# Altium PCB 垃圾分类组1.PcbDoc
Units mil, origin at the board's own origin, x right, y up, seen from the top; angles counter-clockwise.
Board outline 3937.01 x 3937 mil, 4 copper layers (Top Layer, 5V, VCC, Bottom Layer), stack 30.634 mil thick; 67 components, 53 nets, 337 pads, 119 vias.
Unrouted connection lines stored in the file: 1.
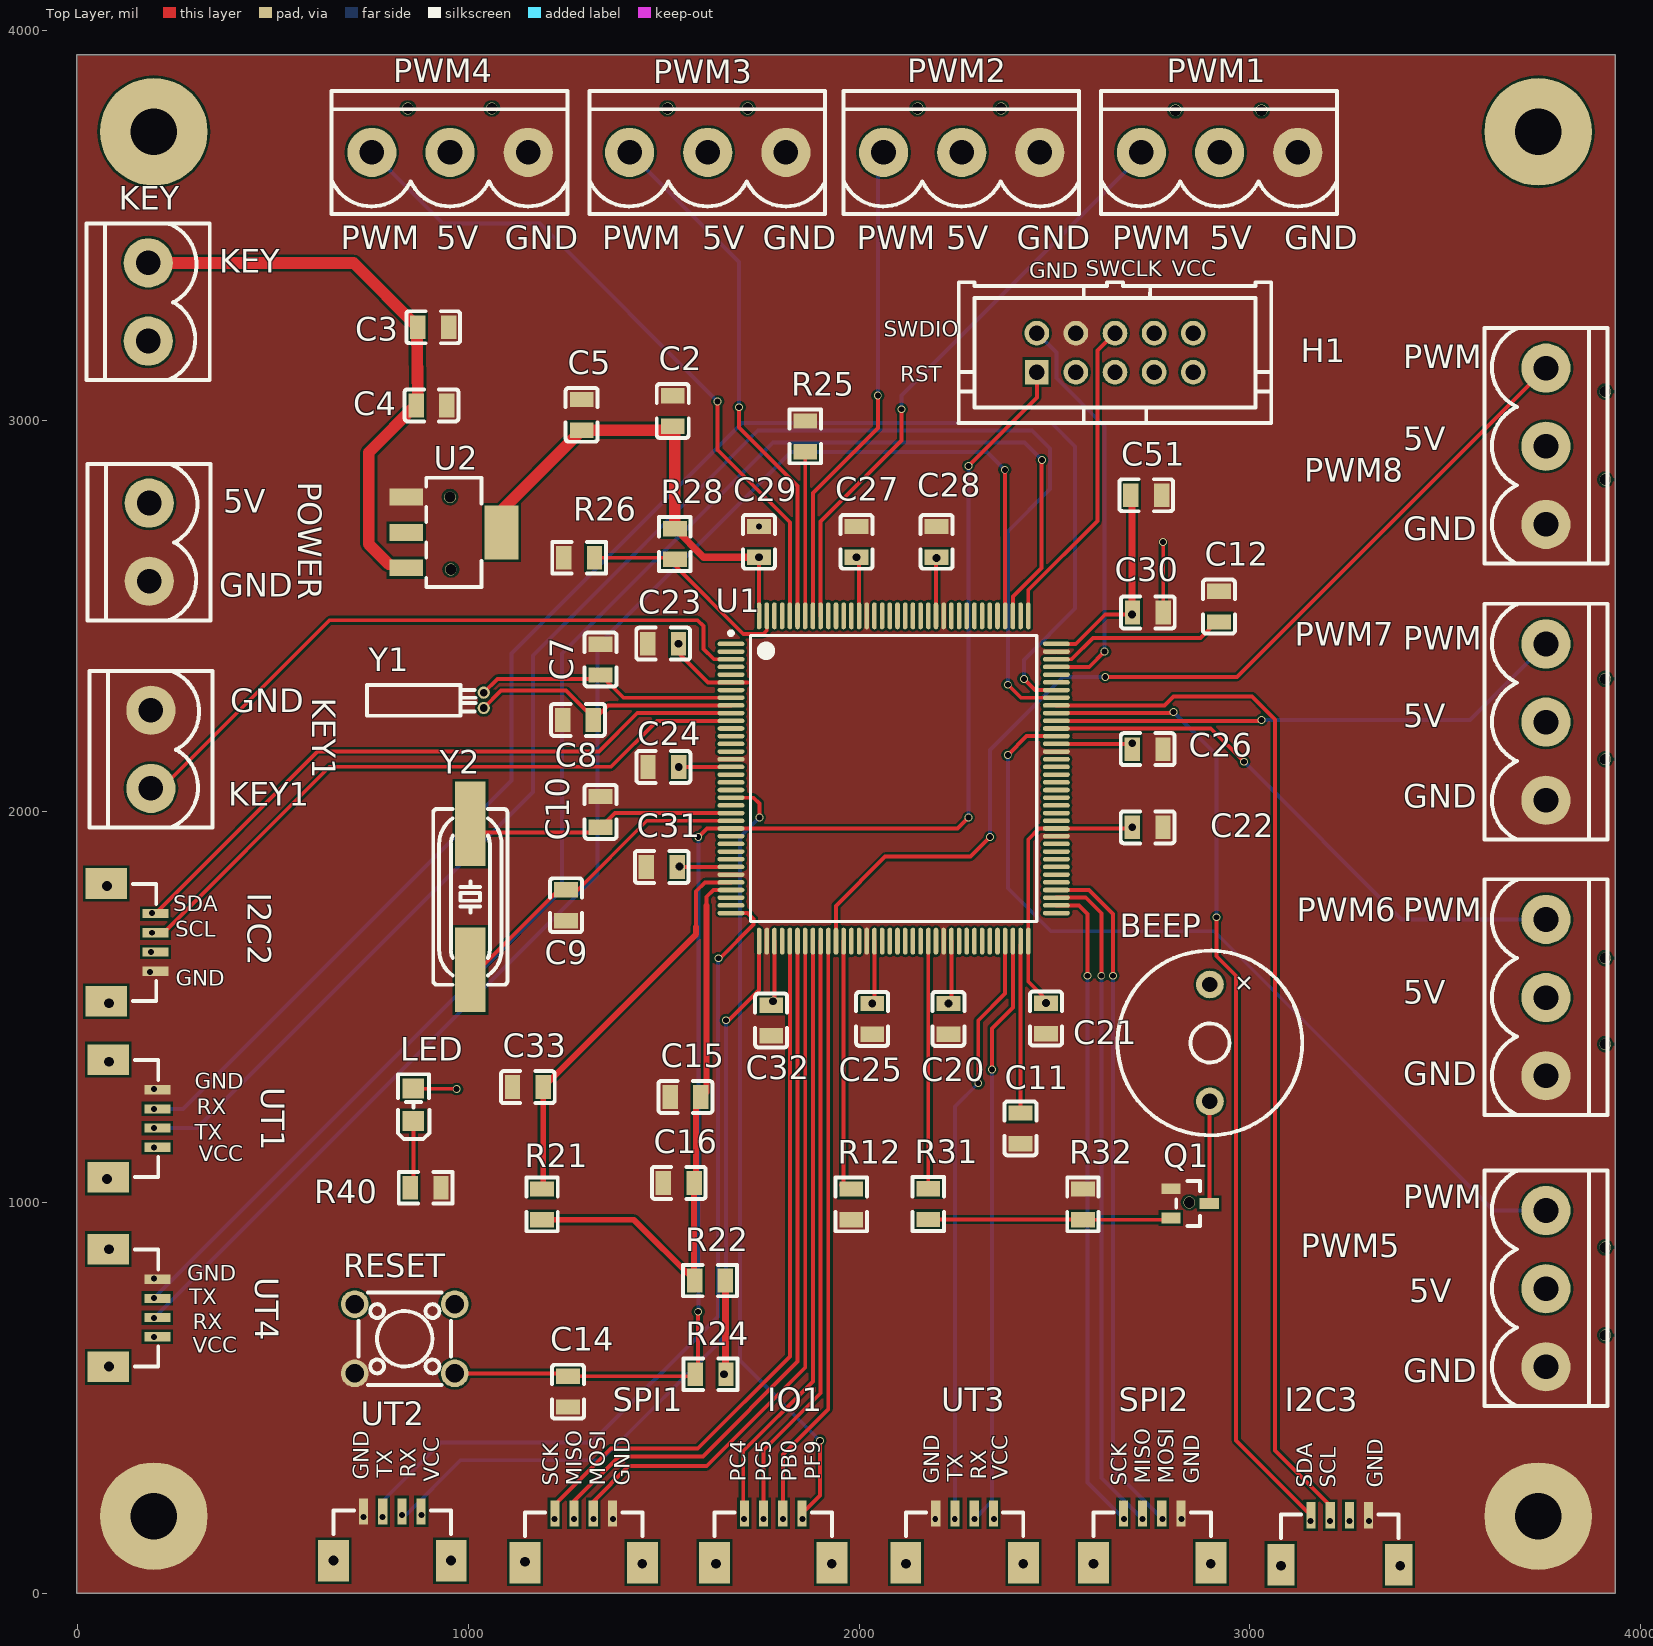
[diagram p0: Top Layer view]
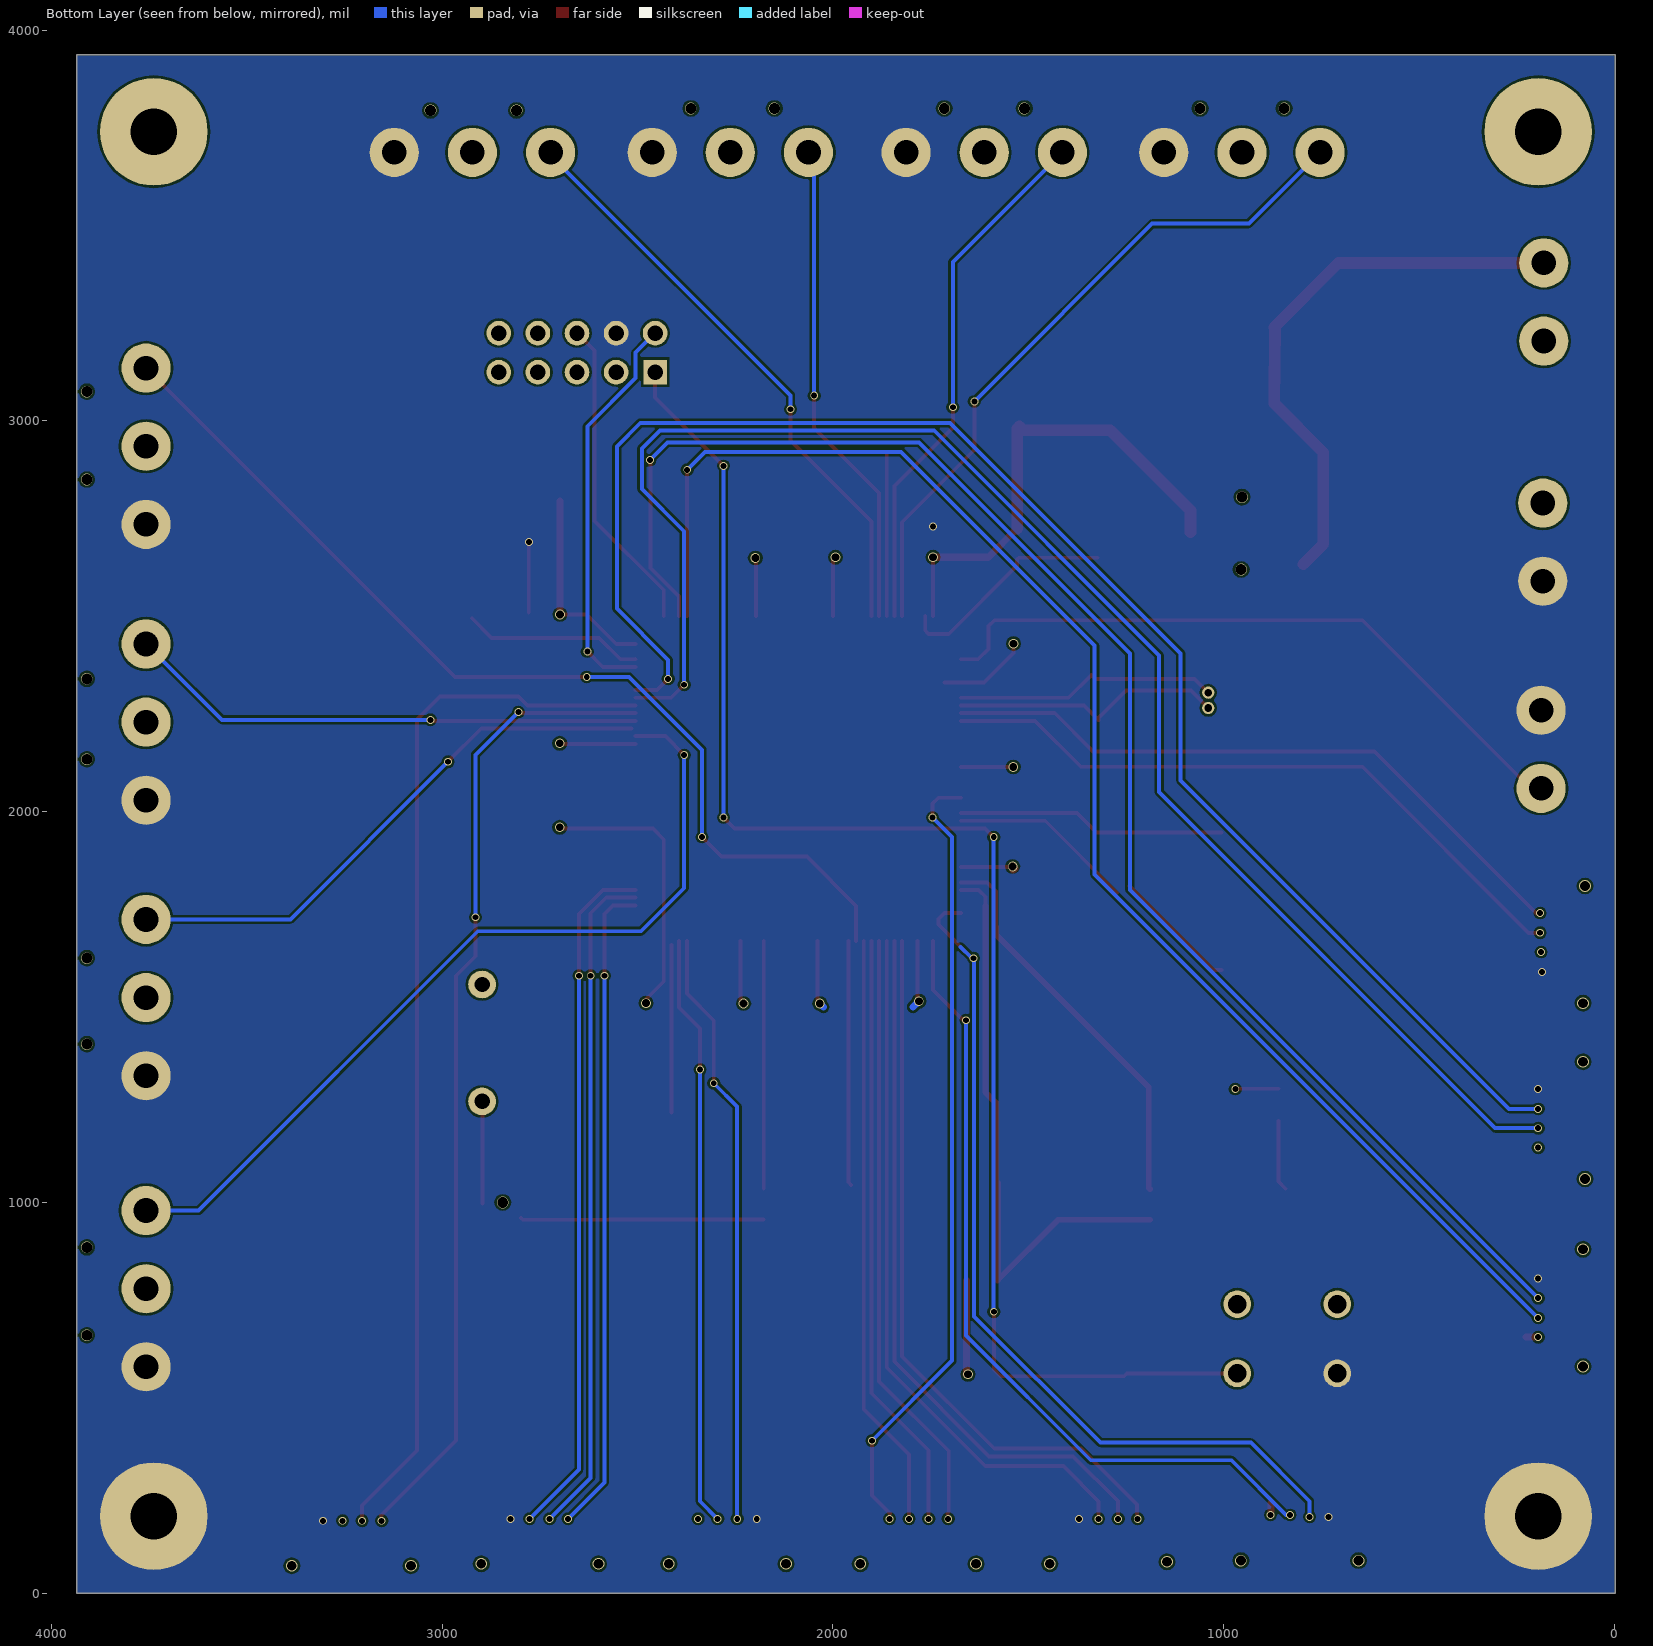
[diagram p1: Bottom Layer view, seen from below]
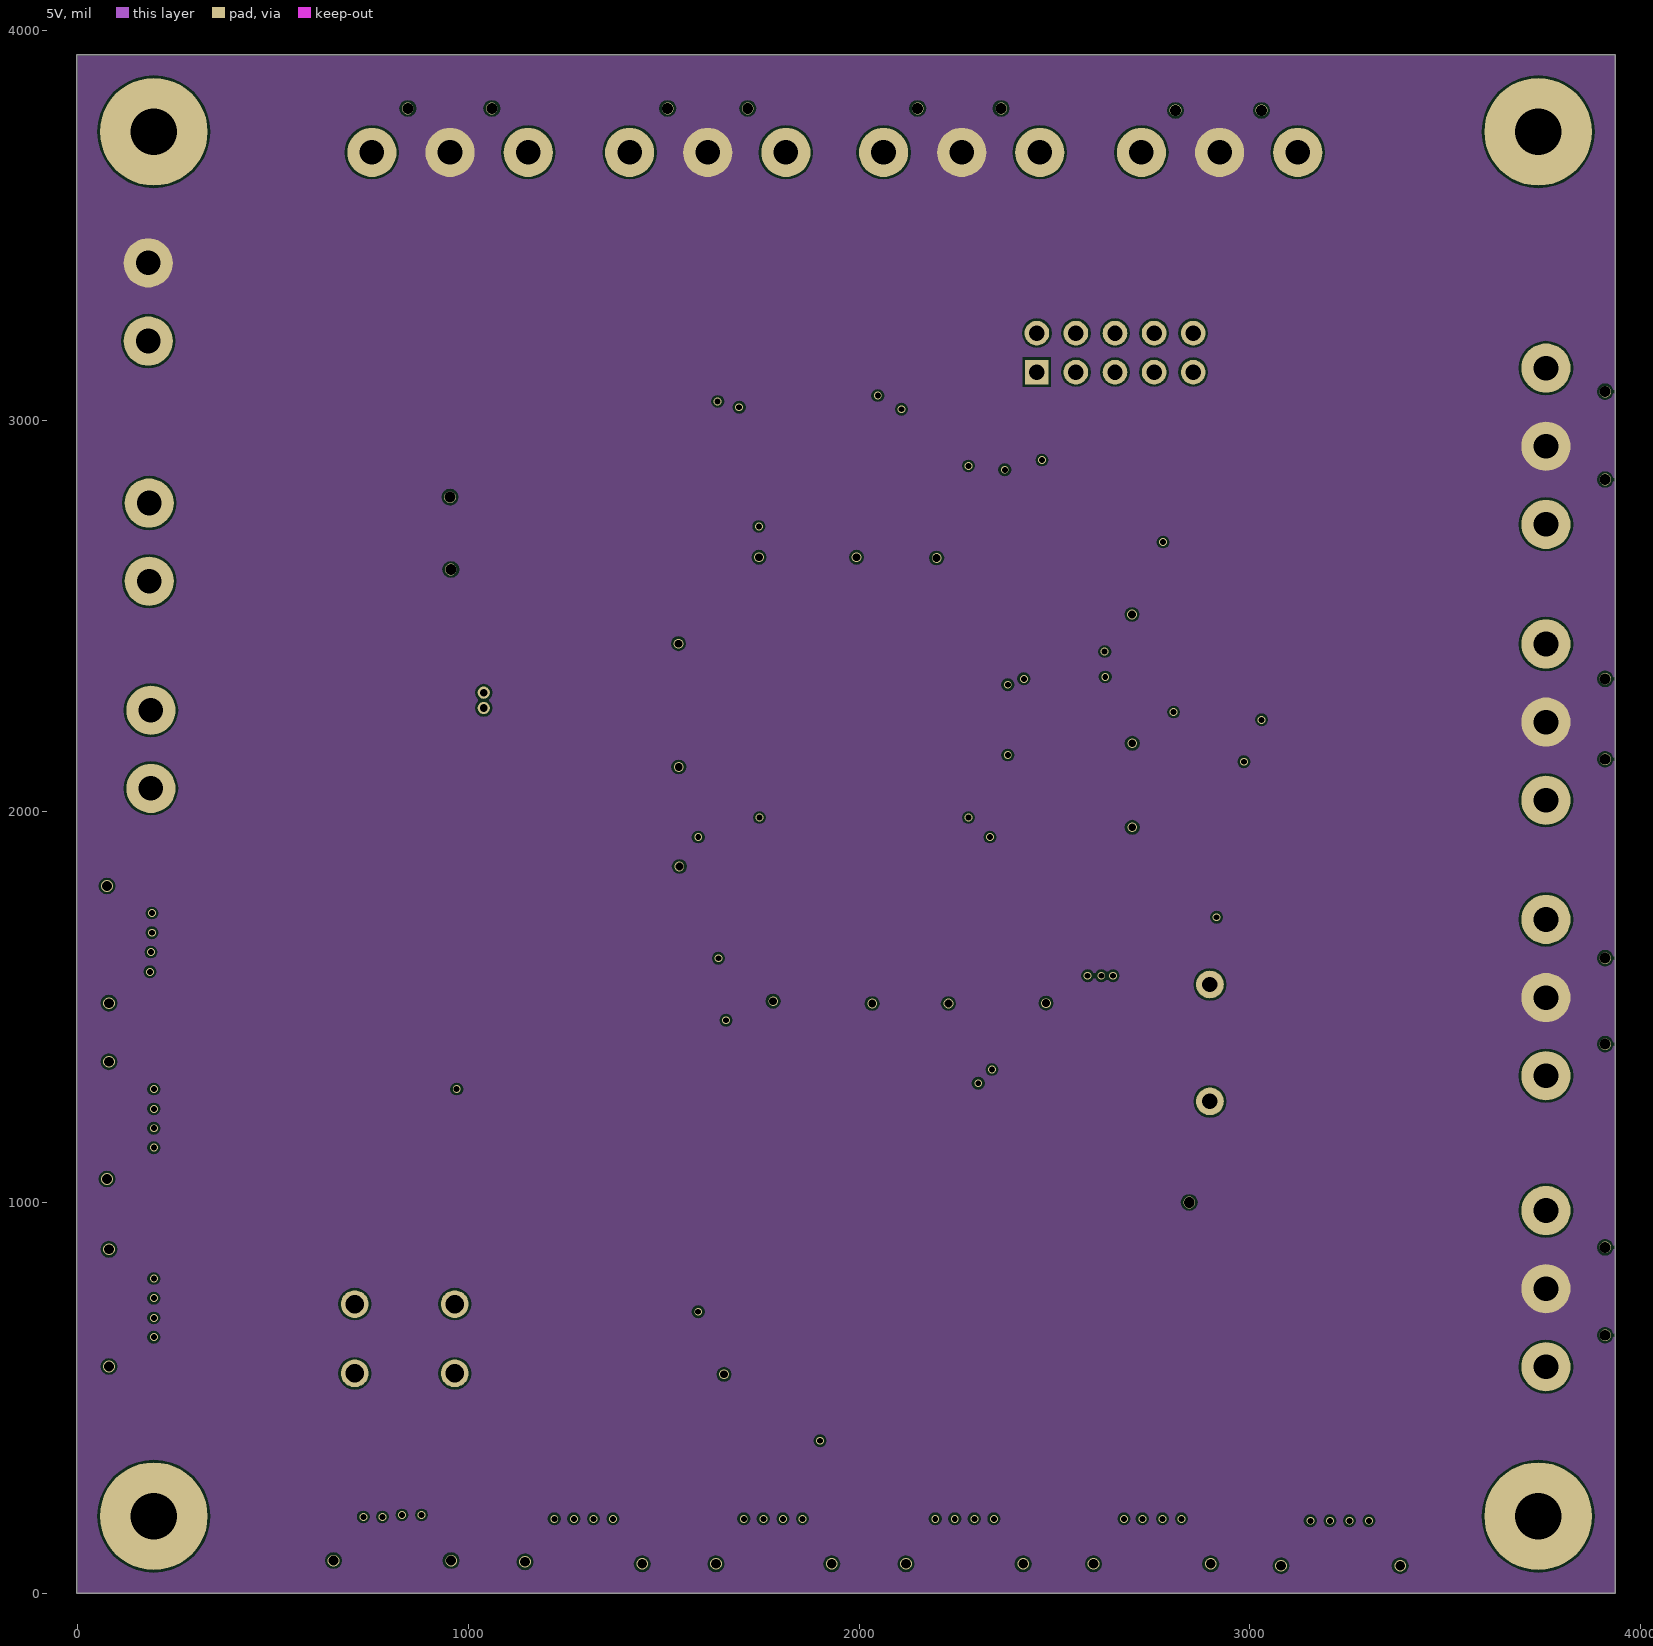
[diagram p2: 5V]
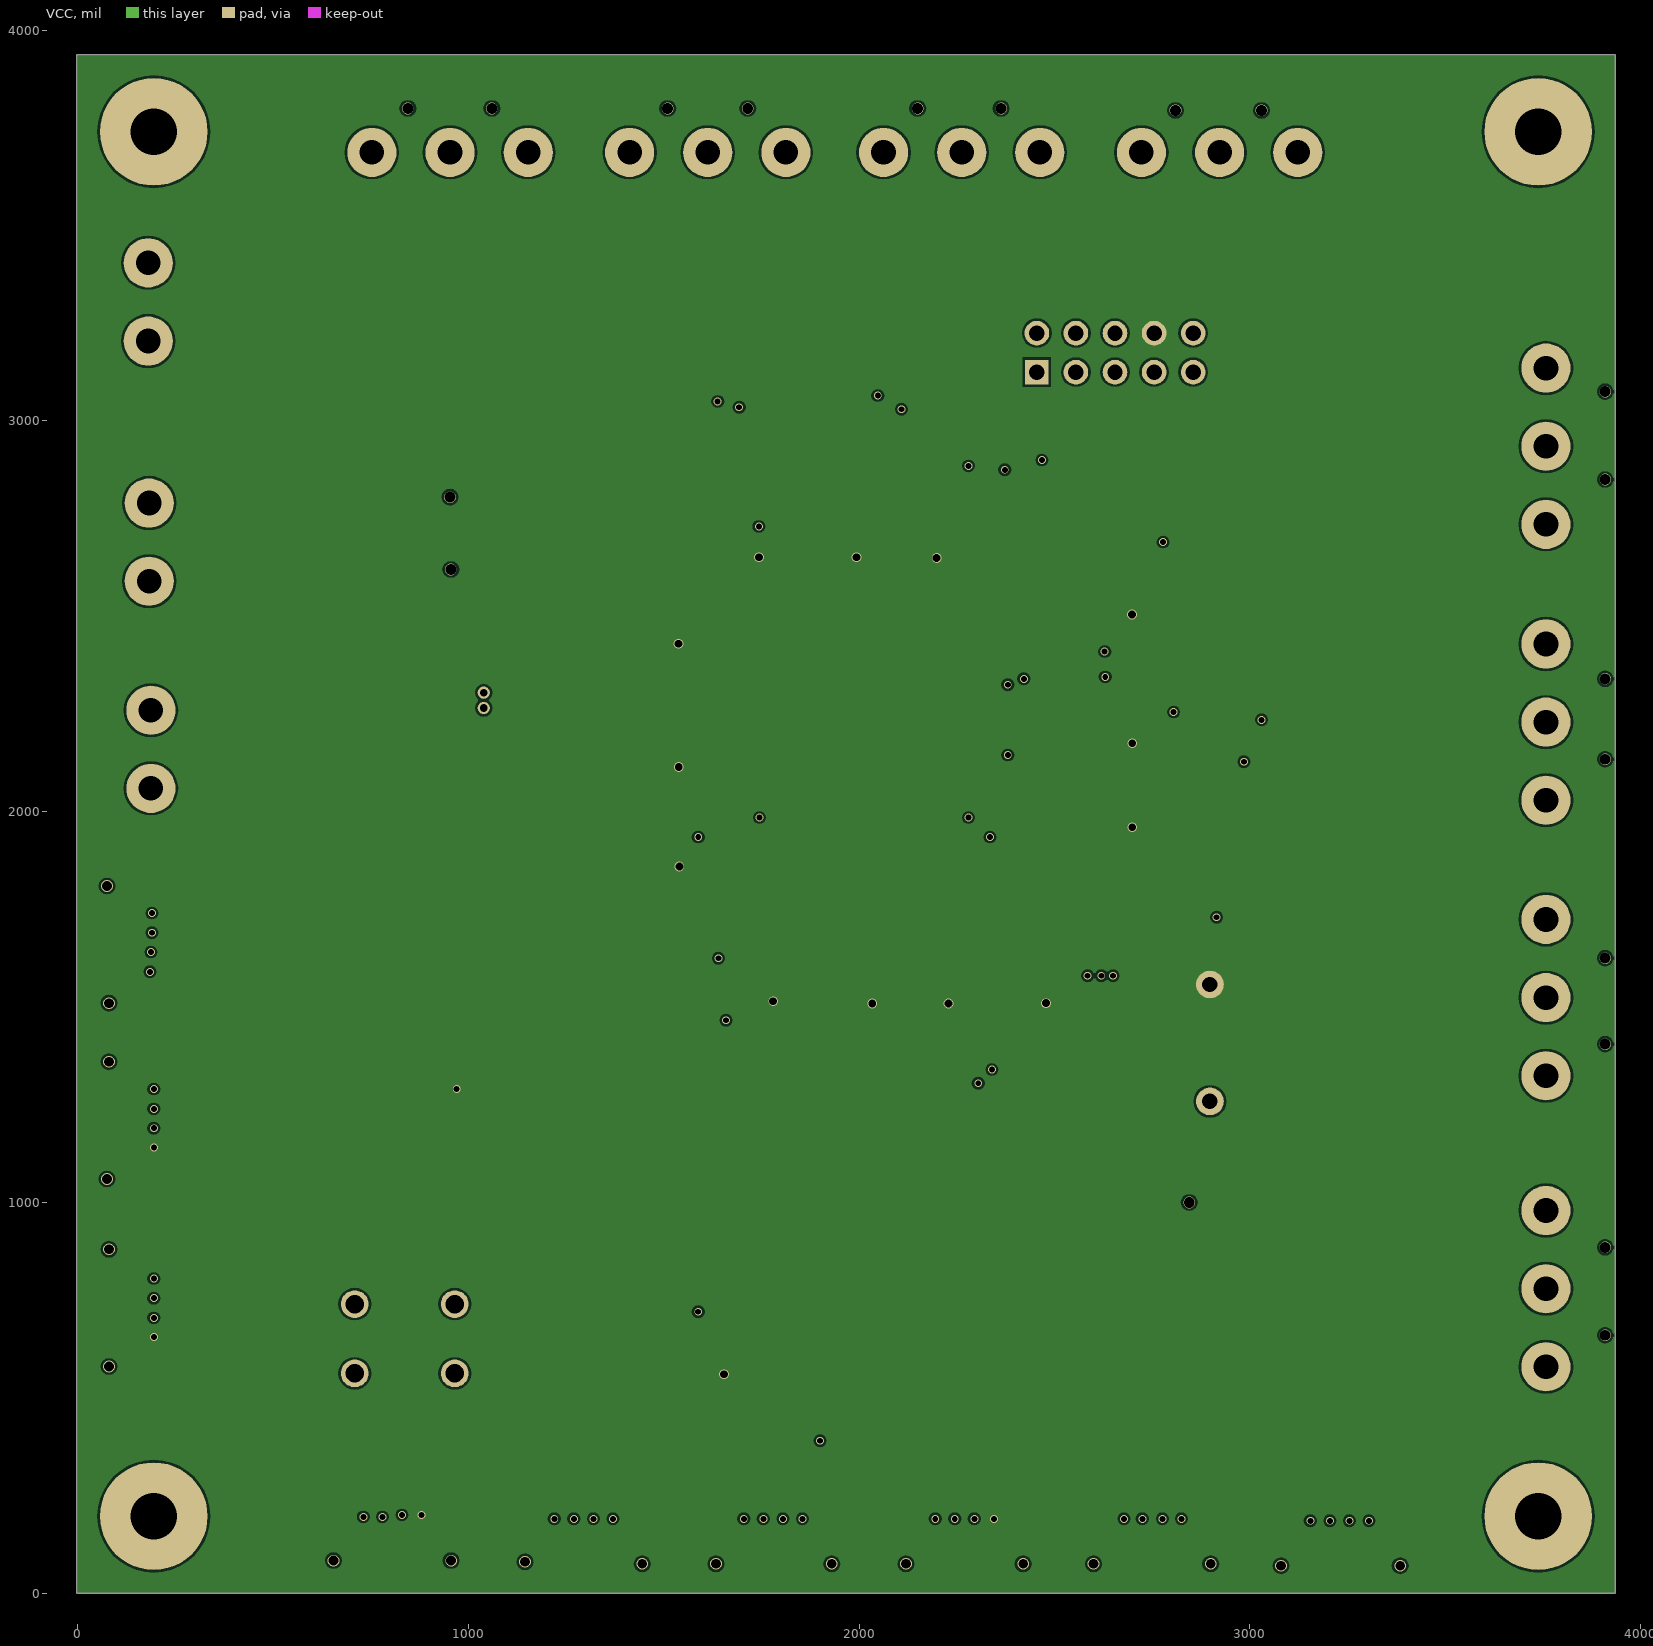
[diagram p3: VCC]

## Layer stack, top to bottom
Top Solder: solder mask 0.4, Solder Resist, Dk 3.5
Top Layer: signal copper 1.4
Dielectric 1: core 10, FR-4, Dk 4.2
5V: signal copper 1.417
Dielectric 3: prepreg 5, Dk 4.2
VCC: signal copper 1.417
Dielectric 2: core 10, Dk 4.2
Bottom Layer: signal copper 1.4
Bottom Solder: solder mask 0.4, Solder Resist, Dk 3.5

## Board outline
-2.01,0 -2.01,3937 3935,3937 3934.99,0

## Design rules (kind name [scope] priority, off if disabled: settings)
Clearance [All] p1: gap=6 ignorepadtopadclearanceinfootprint=FALSE
PolygonConnect PolygonConnect_G [IsVia] p1: connectstyle=Direct reliefconductorwidth=10 reliefentries=4 polygonreliefangle="90 Angle" airgapwidth=10
PolygonConnect PolygonConnect_H [All] p2: connectstyle=Direct reliefconductorwidth=15 reliefentries=4 polygonreliefangle="90 Angle" airgapwidth=15
RoutingVias [All] p1: holewidth=28 width=50 viastyle="Through Hole" minholewidth=28 minwidth=50 maxholewidth=28 maxwidth=50
SolderMaskExpansion [All] p1: expansion=4 istentingtop=FALSE
Width Width_1 [All] p1: maxlimit=100 minlimit=10 preferedwidth=10 midlayer1_maxwidth=10 midlayer2_maxwidth=10 minimp=50.000000 maximp=50.000000 favimp=50.000000
30 further rules are at their usual default settings.

## Components (designator, comment, footprint, x,y, rotation, side; value= is the part's Value field where it differs from the comment)
BEEP "" 蜂鸣器 2901.7,1400 r270 top
C2 "104" C0805 1522.99,3025.63 r90 top
C3 "106" C0805 910,3240 r0 top
C4 "104" C0805 905.63,3040 r0 top
C5 "106" C0805 1290,3015.63 r90 top
C7 "12pF" C0805 1338.5,2389.37 r270 top
C8 "12pF" C0805 1280.63,2235 r0 top
C9 "22pF" C0805 1250,1760.63 r270 top
C10 "22pF" C0805 1338.5,1999.37 r90 top
C11 "225" C0805 2413.11,1189.37 r270 top
C12 "225" C0805 2921,2525 r90 top
C14 "104" C0805 1255,515.63 r90 top
C15 "104" C0805 1555.63,1270 r0 top
C16 "106" C0805 1538.5,1050 r0 top
C20 "104" C0805 2228.5,1469.61 r270 top
C21 "104" C0805 2478.5,1470.63 r270 top
C22 "104" C0805 2738.5,1960 r0 top
C23 "104" C0805 1498.5,2430 r180 top
C24 "104" C0805 1499.13,2114.53 r180 top
C25 "104" C0805 2033.5,1469.61 r270 top
C26 "104" C0805 2738.5,2160 r0 top
C27 "104" C0805 1993.5,2690.63 r90 top
C28 "104" C0805 2198.5,2690.63 r90 top
C29 "104" C0805 1743.5,2690.63 r90 top
C30 "104" C0805 2739.13,2510 r0 top
C31 "104" C0805 1495,1858.62 r180 top
C32 "104" C0805 1775,1465.63 r270 top
C33 "104" C0805 1152.24,1295 r180 top
C51 "104" C0805 2735,2810 r0 top
H1 "" 牛角座2.54-2x5P 2684.9,3200 r0 top
I2C2 "" GH1.25_4P#1 135,1660.66 r270 top
I2C3 "" GH1.25_4P#2 3235,135 r0 top
IO1 "" GH1.25_4P#1 1785,140 r0 top
KEY "" Porwer 162.99,3305 r270 top (schematic designator H3)
KEY1 "" Porwer 170,2160 r270 top
LED "" LED0805BLUE 860,1245 r90 top
POWER "" Porwer 165.51,2690.39 r270 top
PWM1 "" PWM 2917.99,3700 r180 top
PWM2 "" PWM 2257.99,3700 r180 top
PWM3 "" PWM 1607.99,3700 r180 top
PWM4 "" PWM 948.38,3700 r180 top
PWM5 "" PWM 3770.47,783.82 r90 top
PWM6 "" PWM 3770.47,1528.82 r90 top
PWM7 "" PWM 3770.47,2233.82 r90 top
PWM8 "" PWM 3770.47,2940 r90 top
Q1 "S8050" S8050 2842.99,1000 r180 top
R12 "10K" R0805 1980,995 r270 top
R21 "0R" R0805 1188.5,995 r270 top
R22 "0R" R0805 1618.5,800 r0 top
R24 "10K" R0805 1620,560 r0 top
R25 "10K" R0805 1862.13,2960.63 r90 top
R26 "0R" R0805 1283.5,2650 r180 top
R28 "0R" R0805 1528.5,2685 r90 top
R31 "1K" R0805 2177.09,995.63 r270 top
R32 "1K" R0805 2572.99,995 r270 top
R40 "680R" R0805 890.63,1037.48 r180 top
RESET "Key" "KEY - duplicate" 840,665 r180 top
SPI1 "" GH1.25_4P#1 1300,140 r0 top
SPI2 "" GH1.25_4P#1 2755,140 r0 top
U1 "STM32F407ZET6" LQFP144N 2088.5,2085 r0 top
U2 "AMS1117-3.3V" ASM1117（yyh） 958.31,2709.76 r180 top
UT1 "" GH1.25_4P#1 140,1210 r270 top
UT2 "" GH1.25_4P#1 810,145 r0 top
UT3 "" GH1.25_4P#1 2275,140 r0 top
UT4 "" GH1.25_4P#1 140,725 r270 top
Y1 "32.768k" 晶振（32.768MHz） 895,2285 r0 top value=8MHz
Y2 "8MHz" 晶振（8MHz） 1005,1782.01 r270 top

## Footprints (in the part's own frame and the unit in brackets; to place one, negate y for a bottom-side part, rotate by r counter-clockwise, add the part's x,y. Pads: shape width x height; smd on the part's side, far side on the other; paste and mask are expansions set on the pad)
ASM1117（yyh） [mm]
  rect 2.2x1.1 smd: 1(2.98,-2.433) 2(2.98,-0.133) 3(2.98,2.167)
  rect 2.2x3.5 smd: 4(-3.218,-0.133)
  silkscreen extent -1.92,-3.68 1.68,3.42
C0805 [mm]
  rect 1x1.55 smd: 1(-1,0) 2(1,0)
  silkscreen extent -1.75,-1.04 1.75,1.04
GH1.25_4P#1 [mil]
  rect 23.6x67 smd: 1(-78.54,64.14) 2(-29.34,64.14) 3(19.87,64.14) 4(69.08,64.14)
  rect 78.74x106.3 smd: 5(145.85,-61.85) 6(-155.32,-61.85)
  silkscreen extent -155,6 145,66
GH1.25_4P#2 [mil]
  rect 23.6x67 smd: 1(-78.54,64.14) 2(-29.34,64.14) 3(19.87,64.14) 4(69.08,64.14)
  rect 70x106.3 smd: 5(145.85,-61.85) 6(-155.32,-61.85)
  silkscreen extent -155,6 145,66
"KEY - duplicate" [mm]
  round 1.8 hole 1.2: 1(-3.178,2.606) 2(3.322,2.606) 3(-3.178,-1.894) 4(3.322,-1.894)
  silkscreen extent -2.93,-2.64 3.07,3.36
LED0805BLUE [mil]
  rect 51.2x55.1 smd: 1(45.9,0.55) 2(-36.8,0.55)
  silkscreen extent -83,-41 83,41
LQFP144N [mm]
  oval 1.75x0.297 smd: 1(-10.575,8.75) 2(-10.575,8.25) 3(-10.575,7.75) 4(-10.575,7.25) 5(-10.575,6.75) 6(-10.575,6.25) 7(-10.575,5.75) 8(-10.575,5.25) 9(-10.575,4.75) 10(-10.575,4.25) 11(-10.575,3.75) 12(-10.575,3.25) 13(-10.575,2.75) 14(-10.575,2.25) 15(-10.575,1.75) 16(-10.575,1.25) 17(-10.575,0.75) 18(-10.575,0.25) 19(-10.575,-0.25) 20(-10.575,-0.75) 21(-10.575,-1.25) 22(-10.575,-1.75) 23(-10.575,-2.25) 24(-10.575,-2.75) 25(-10.575,-3.25) 26(-10.575,-3.75) 27(-10.575,-4.25) 28(-10.575,-4.75) 29(-10.575,-5.25) 30(-10.575,-5.75) 31(-10.575,-6.25) 32(-10.575,-6.75) 33(-10.575,-7.25) 34(-10.575,-7.75) 35(-10.575,-8.25) 36(-10.575,-8.75) 73(10.575,-8.75) 74(10.575,-8.25) 75(10.575,-7.75) 76(10.575,-7.25) 77(10.575,-6.75) 78(10.575,-6.25) 79(10.575,-5.75) 80(10.575,-5.25) 81(10.575,-4.75) 82(10.575,-4.25) 83(10.575,-3.75) 84(10.575,-3.25) 85(10.575,-2.75) 86(10.575,-2.25) 87(10.575,-1.75) 88(10.575,-1.25) 89(10.575,-0.75) 90(10.575,-0.25) 91(10.575,0.25) 92(10.575,0.75) 93(10.575,1.25) 94(10.575,1.75) 95(10.575,2.25) 96(10.575,2.75) 97(10.575,3.25) 98(10.575,3.75) 99(10.575,4.25) 100(10.575,4.75) 101(10.575,5.25) 102(10.575,5.75) 103(10.575,6.25) 104(10.575,6.75) 105(10.575,7.25) 106(10.575,7.75) 107(10.575,8.25) 108(10.575,8.75)
  oval 0.297x1.75 smd: 37(-8.75,-10.575) 38(-8.25,-10.575) 39(-7.75,-10.575) 40(-7.25,-10.575) 41(-6.75,-10.575) 42(-6.25,-10.575) 43(-5.75,-10.575) 44(-5.25,-10.575) 45(-4.75,-10.575) 46(-4.25,-10.575) 47(-3.75,-10.575) 48(-3.25,-10.575) 49(-2.75,-10.575) 50(-2.25,-10.575) 51(-1.75,-10.575) 52(-1.25,-10.575) 53(-0.75,-10.575) 54(-0.25,-10.575) 55(0.25,-10.575) 56(0.75,-10.575) 57(1.25,-10.575) 58(1.75,-10.575) 59(2.25,-10.575) 60(2.75,-10.575) 61(3.25,-10.575) 62(3.75,-10.575) 63(4.25,-10.575) 64(4.75,-10.575) 65(5.25,-10.575) 66(5.75,-10.575) 67(6.25,-10.575) 68(6.75,-10.575) 69(7.25,-10.575) 70(7.75,-10.575) 71(8.25,-10.575) 72(8.75,-10.575) 109(8.75,10.575) 110(8.25,10.575) 111(7.75,10.575) 112(7.25,10.575) 113(6.75,10.575) 114(6.25,10.575) 115(5.75,10.575) 116(5.25,10.575) 117(4.75,10.575) 118(4.25,10.575) 119(3.75,10.575) 120(3.25,10.575) 121(2.75,10.575) 122(2.25,10.575) 123(1.75,10.575) 124(1.25,10.575) 125(0.75,10.575) 126(0.25,10.575) 127(-0.25,10.575) 128(-0.75,10.575) 129(-1.25,10.575) 130(-1.75,10.575) 131(-2.25,10.575) 132(-2.75,10.575) 133(-3.25,10.575) 134(-3.75,10.575) 135(-4.25,10.575) 136(-4.75,10.575) 137(-5.25,10.575) 138(-5.75,10.575) 139(-6.25,10.575) 140(-6.75,10.575) 141(-7.25,10.575) 142(-7.75,10.575) 143(-8.25,10.575) 144(-8.75,10.575)
  silkscreen extent -10.7,-9.3 9.3,9.57
Porwer [mil]
  round 125.98 hole 63: 1(-99.61,17.48) 2(100.39,17.48)
  silkscreen extent -200,-140 201,175
PWM [mil]
  round 125.98 hole 63: 1(-204.61,12.48) 2(-4.61,12.48) 3(195.39,12.48)
  silkscreen extent -305,-145 298,170
R0805 [mm]
  rect 1x1.55 smd: 1(-1,0) 2(1,0)
  silkscreen extent -1.75,-1.02 1.75,1.02
S8050 [mil]
  rect 49.21x27.56 smd: 1(45,-34.8) 2(45,40) 3(-53.4,2.6)
  silkscreen extent -30,-55 31,60
晶振（8MHz） [mm]
  rect 5.5x2 smd: 1(-4.75,0) 2(4.75,0)
  silkscreen extent -5.72,-2.41 5.72,2.41
晶振（32.768MHz） [mm]
  round 0.8 hole 0.5: 1(3.664,0.5) 2(3.664,-0.5)
  silkscreen extent -3.94,-1 3.13,1
牛角座2.54-2x5P [mm]
  rect 1.524x1.6 hole 1: 1(-5.839,-1.905)
  round 1.6 hole 1: 2(-5.839,0.635) 3(-3.299,-1.905) 4(-3.299,0.635) 5(-0.759,-1.905) 6(-0.759,0.635) 7(1.781,-1.905) 8(1.781,0.635) 9(4.321,-1.905) 10(4.321,0.635)
  silkscreen extent -10.92,-5.21 9.4,3.94
蜂鸣器 [mm]
  round 1.8 hole 1: 1(-4.006,-0.096) 2(3.594,-0.096)
  silkscreen extent -6.21,-6.09 5.79,5.9

## Part data
BEEP: library part BEEP
C2: library part Cap, "Capacitor", LatestRevisionDate=17-Jul-2002, LatestRevisionNote="Re-released for DXP Platform.", PackageReference=RAD-0.3, Published=8-Jun-2000, Publisher="Altium Limited"
C3 C4 C5: library part 0805C, "Capacitor", 0805=pf
C7 C8 C9 C10 C11 C12 C14 C15 C16 C20 C21 C22 C23 C24 C25 C26 C27 C28 C29 C30 C31 C32 C33 C51: library part CAP, "Capcitor"
H1: library part SWD
I2C2 I2C3 IO1 SPI1 SPI2 UT1 UT2 UT3 UT4: library part GH1.25_4P_ckou
KEY KEY1: library part "Header 2", "Header, 2-Pin", LatestRevisionDate=17-Jul-2002, LatestRevisionNote="Re-released for DXP Platform.", Publisher="Altium Limited"
LED: library part LED2, "Typical RED, GREEN, YELLOW, AMBER GaAs LED", LatestRevisionDate=17-Jul-2002, LatestRevisionNote="Re-released for DXP Platform.", PackageDescription="SM LED; 2 Flat Leads", PackageReference=3.2X1.6X1.1, PackageVersion=Feb-2002, Published=8-Jun-2000, Publisher="Altium Limited"
POWER: library part dianyuan
PWM1 PWM2 PWM3 PWM4 PWM5 PWM6 PWM7 PWM8: library part pwm
Q1: library part 2N3904, "NPN General Purpose Amplifier", ComponentLink1Description="Manufacturer Link", ComponentLink1URL=http://www.fairchildsemi.com/, ComponentLink2Description=Datasheet, ComponentLink2URL=http://www.fairchildsemi.com/ds/2N%2F2N3904.pdf, DatasheetVersion=1997, LatestRevisionDate=15-Jan-2003, LatestRevisionNote="PCB Footprint 'BCY-W3/D4.7' replaced", PackageDescription="TO, Flat Index; 3 In-Line, Axial Leads; Body Dia. 4.5mm; Leads 0.51 x 0.48 mm (max)", PackageReference=TO-92A, PackageVersion=Sep-1998, Published=8-Jun-2000, Publisher="Altium Limited"
R12 R21 R22 R24 R25 R26 R28 R31 R32 R40: library part Res2, "Resistor"
RESET: library part Jumper, "Jumper Wire", LatestRevisionDate=17-Jul-2002, LatestRevisionNote="Re-released for DXP Platform.", PackageReference=RAD-0.2, Published=24-Mar-1999, Publisher="Altium Limited"
U2: library part 11
Y1: library part CRYSTAL, "Crystal 8MHz PLUG"
Y2: library part XTAL, "Crystal Oscillator"

## Free pads (board coordinates)
  round 275.59 hole 118.11: 3(194.84,196.85) 3(194.84,3740.15) 3(3738.15,196.85) 3(3738.15,3740.15)

## Via types
v1: diameter 20, hole 15, Top Layer to Bottom Layer, 68 vias
v2: diameter 30, hole 28, Top Layer to Bottom Layer, 19 vias
v3: diameter 30, hole 25, Top Layer to Bottom Layer, 17 vias
v4: diameter 25, hole 20, Top Layer to Bottom Layer, 14 vias
v5: diameter 30/30/30/30 (per signal layer), hole 25, Top Layer to Bottom Layer, 1 vias

## Nets (pads, with @x,y where several pads share a name; then routed paths per layer and width w, separated by ;. In a path a pad name is that pad's centre, name@x,y a point inside that pad or via, vN(x,y) a via of type N, cw(c..) or ccw(c..) an arc to the next point about the centre after c; other vN are vias at no path point)
+5: KEY.2 POWER.1 | length 3.6
  Top Layer w10: POWER.1@180.47,2792.52 POWER.1
BEEP: R31.1 U1.59 | length 633.7
  Top Layer w10: R31.1 U1.59
BOOT0: R25.1 U1.138 | length 419.9
  Top Layer w10: U1.138 R25.1
BOOT1: R12.1 U1.48 | length 626.6
  Top Layer w10: R12.1@1953.5,1045 1960.55,1052.05 U1.48
GND: C2.2 C3.2 C4.2 C5.2 C7.1 C8.1 C9.2 C10.2 C11.2 C12.2 C14.1 C15.1 C16.1 C20.2 C21.2 C22.2 C23.2 C24.2 C25.2 C26.2 C27.2 C28.2 C29.2 C30.2 C31.2 C32.2 C33.2 C51.2 H1.4 I2C2.4 I2C3.4 KEY1.1 pad.3@194.84,196.85 pad.3@3738.15,196.85 POWER.2 PWM1.1 PWM2.1 PWM3.1 PWM4.1 PWM5.1 PWM6.1 PWM7.1 PWM8.1 Q1.1 R12.2 R25.2 R26.2 R32.1 R40.1 RESET.2 SPI1.4 SPI2.4 U1.16 U1.31 U1.38 U1.51 U1.61 U1.83 U1.94 U1.107 U1.120 U1.130 U2.1 UT1.1 UT2.1 UT3.1 UT4.1 | length 180.3
  Top Layer w10: v1(2777.87,2690) 2778.5,2689.37 C30.2
  other v1: 3305,185 1370,190 2195,190 2825,190 731.26,195 195,805 195,1290 185,1590 1743.5,2730
KEY: C3.1 C4.1 KEY.1 PWM1.2 PWM2.2 PWM3.2 PWM4.2 PWM5.2 PWM6.2 PWM7.2 PWM8.2 U2.3 | length 1487.2
  Top Layer w30: KEY.1@215.08,3370 KEY.1 706.02,3404.61 C3.1 ; 796.5,2633.5 745,2685 745,2919.37 870.63,3045 C3.1@868.62,3239.98
KEY1: KEY1.2 U1.3 | length 1734.1
  Top Layer w10: KEY1.2@210,2038.74 210,2055 645,2490 1586.7,2490 1601.61,2475.09 1601.61,2416.89 1628.39,2390.12 U1.3
NetBEEP_2: BEEP.2 Q1.3 | length 261.3
  Top Layer w10: BEEP.2@2895.84,1258.52 2896.39,1257.96 Q1.3
NetC9_1: C9.1 U1.24 Y2.2 | length 801.3
  Top Layer w10: Y2.2 1026.26,1595 C9.1@1241.26,1810 ; C9.1@1272.44,1792.56 1456.6,1976.73 U1.24
NetC10_1: C10.1 U1.23 Y2.1 | length 687.6
  Top Layer w10: Y2.1@1005,1947.01 1325.51,1947.01 C10.1 1374.92,1996.42 U1.23
NetC11_1: C11.1 U1.71 | length 428.7
  Top Layer w10: C11.1@2413.11,1230 2413.11,1509.64 U1.71@2413.11,1658.66
NetC12_1: C12.1 U1.106 | length 463.7
  Top Layer w10: U1.106@2505.98,2391.26 U1.106 2543.62,2390.12 2598.5,2445 2873.5,2445 C12.1@2923.5,2495
NetLED_2: LED.2 R40.2 | length 180.7
  Top Layer w10: R40.2@841.26,1035 859.45,1053.19 LED.2
NetQ1_2: Q1.2 R31.2 R32.2 | length 623
  Top Layer w10: R31.2 2572.36,956.26 R32.2 2793.62,955.63 Q1.2
NetR26_1: R26.1 R28.1 U1.143 | length 572
  Top Layer w10: R26.1 1524.13,2650 R28.1 1528.5,2630 1703.5,2455 1755,2455 1763.7,2463.7 U1.143
PA2: U1.36 UT2.2 | length 2260.4
  Top Layer w10: v1(1640,1625) 1643.5,1625 1730,1711.5 1730,1725 1714.49,1740.51 U1.36
  Bottom Layer w10: v1(780,195) 780,235 930,385 1315,385 1638.37,708.37 1638.37,1623.37 v1(1640,1625) 1643.82,1625 1672.99,1654.17
PA3: U1.37 UT2.3 | length 2067.9
  Top Layer w10: v1(1659.37,1466.06) 1666.06,1466.06 1744.02,1544.02 U1.37
  Bottom Layer w10: v1(830,200) 840,200 980,340 1340,340 1659.37,659.37 v1(1659.37,1466.06)
PA5: SPI1.1 U1.41 | length 1843.7
  Top Layer w10: SPI1.1 1221.46,226.46 1365,370 1587.17,370 1822.76,605.59 U1.41
  other v1: 1220,190
PA6: SPI1.2 U1.42 | length 1827.3
  Top Layer w10: SPI1.2 1270.66,235.66 1385,350 1600,350 1842.44,592.44 U1.42
  other v1: 1270,190
PA7: SPI1.3 U1.43 | length 1806.3
  Top Layer w10: SPI1.3 1319.87,234.87 1410,325 1610,325 1862.13,577.13 U1.43
  other v1: 1320,190
PA8: I2C3.2 U1.100 | length 2689
  Top Layer w10: U1.100 2782.01,2272.01 2805,2295 3005.55,2295 3065,2235.55 3065,365 3205.66,224.34 I2C3.2
  other v1: 3205,185
PA9: U1.101 UT1.3 | length 4045.3
  Top Layer w10: v1(2380.7,2325) 2414.01,2291.69 U1.101
  Bottom Layer w10: v1(195,1190) 305,1190 1165,2050 1165,2400 1740.6,2975.6 2055,2975.6 ; 2055,2976.02 2442.6,2976.02 2488.99,2929.63 2488.99,2826 2380.7,2717.71 v1(2380.7,2325)
PA10: U1.102 UT1.2 | length 4044.8
  Top Layer w10: v1(2421.73,2340) 2450.35,2311.38 U1.102
  Bottom Layer w10: v1(195,1239.34) 269.34,1239.34 1110,2080 1110,2405 1700,2995 2492.99,2995 2552.99,2935 2552.99,2520 2421.73,2388.74 v1(2421.73,2340)
PB0: IO1.3 U1.46 | length 1512.7
  Top Layer w10: IO1.3 1804.87,355 1921.18,471.31 U1.46
  other v1: 1805,190
PB1: PWM8.3 U1.47 | length 2608.1
  Top Layer w10: U1.47 1940.87,1759.13 2066.73,1885 2285,1885 v1(2335,1935) ; v1(2630,2345) 2967.6,2345 PWM8.3
  Bottom Layer w10: v1(2335,1935) 2335,2157.72 2522.28,2345 v1(2630,2345)
PB6: PWM1.3 U1.136 | length 1526.3
  Top Layer w10: U1.136 1901.5,2742.99 2108.5,2950 v1(2108.5,3030)
  Bottom Layer w10: v1(2108.5,3030) 2108.5,3065 2722.6,3679.1 PWM1.3
PB7: PWM2.3 U1.137 | length 1261.5
  Top Layer w10: U1.137 1881.81,2815.61 2048.5,2982.31 2047.99,2982.82 v1(2047.99,3065)
  Bottom Layer w10: v1(2047.99,3065) 2047.99,3672.91 PWM2.3
PB8: PWM3.3 U1.139 | length 1364.2
  Top Layer w10: v1(1692.99,3035) 1692.99,2983.01 1842.44,2833.56 U1.139
  Bottom Layer w10: PWM3.3 1692.99,3407.13 v1(1692.99,3035)
PB9: PWM4.3 U1.140 | length 1774.8
  Top Layer w10: v1(1637.99,3050) 1637.99,2925 1638.25,2925.26 1822.76,2740.75 U1.140
  Bottom Layer w10: PWM4.3 935.51,3505 1182.99,3505 v1(1637.99,3050)
PB10: U1.69 UT3.2 | length 1532.1
  Top Layer w10: v1(2305,1305) 2305,1466.06 2373.94,1535 U1.69
  Bottom Layer w10: v1(2245,190) 2245,1245 v1(2305,1305)
PB11: U1.70 UT3.3 | length 1519.5
  Top Layer w10: v1(2340,1340) 2340,1445 2393.62,1498.62 U1.70
  Bottom Layer w10: v1(2295,190) 2340,235 v1(2340,1340)
PB13: SPI2.1 U1.74 | length 1675.9
  Top Layer w10: U1.74 2562.8,1760.2 2585,1737.99 v1(2585,1580)
  Bottom Layer w10: v1(2585,1580) 2585,282.99 v1(2677.99,190)
PB14: SPI2.2 U1.75 | length 1725.2
  Top Layer w10: U1.75 2580.12,1779.88 2620,1740 v1(2620,1580)
  Bottom Layer w10: v1(2620,1580) 2620,295 v1(2725,190)
PB15: SPI2.3 U1.76 | length 1771
  Top Layer w10: U1.76 2588.43,1799.57 2650,1737.99 v1(2650,1580)
  Bottom Layer w10: v1(2650,1580) 2650,316.39 v1(2776.39,190)
PC4: IO1.1 U1.44 | length 1539.6
  Top Layer w10: IO1.1 1703.5,207.1 1703.5,363.5 1881.81,541.81 U1.44
  other v1: 1705,190
PC5: IO1.2 U1.45 | length 1524.9
  Top Layer w10: IO1.2 1755.66,365.66 1901.5,511.5 U1.45
  other v1: 1755,190
PC6: PWM5.3 U1.96 | length 2204
  Top Layer w10: v1(2380.7,2145) 2428.97,2193.27 U1.96
  Bottom Layer w10: v1(2380.7,2145) 2380.7,1804.12 2490.83,1694 2908.99,1694 3623.78,979.21 PWM5.3
PC7: PWM6.3 U1.97 | length 1445.6
  Top Layer w10: U1.97@2514.84,2212.95 2900,2212.95 v1(2985,2127.95)
  Bottom Layer w10: v1(2985,2127.95) 3388.74,1724.21 PWM6.3
PC8: PWM7.3 U1.98 | length 1334.6
  Top Layer w10: U1.98 3027.64,2232.64 v1(3030,2235)
  Bottom Layer w10: v1(3030,2235) 3563.78,2235 PWM7.3
PC9: I2C3.1 U1.99 | length 2493.9
  Top Layer w10: U1.99 v1@2797.32,2252.32 ; v1(2915,1730) 2915,1630 2965,1580 2965,390.6 I2C3.1
  Bottom Layer w10: v1(2805,2255) 2915,2145 v1(2915,1730)
  other v1: 3155,185
PC10: U1.111 UT4.2 | length 3977.2
  Top Layer w10: U1.111 2393.62,2550.47 2466.88,2623.73 v1@2466.88,2895
  Bottom Layer w10: v1(195,755) 1240,1800 1240,2405 1780,2945 2422.99,2945 v1(2467.99,2900)
PC11: U1.112 UT4.3 | length 3832
  Top Layer w10: v1(2372.99,2875) U1.112
  Bottom Layer w10: v1(195,704.34) 1330,1839.34 1330,2425 1826,2921 2326.99,2921 v1(2372.99,2875)
PC14: C7.2 U1.8 Y1.1 | length 675.9
  Top Layer w10: Y1.1 1074.54,2340 1328.5,2340 C7.2 1396.81,2291.69 U1.8
PC15: C8.2 U1.9 Y1.2 | length 700.8
  Top Layer w10: Y1.2 1083.91,2310 1250,2310 1320,2240 C8.2 1357.01,2272.01 U1.9
PF0: I2C2.1 U1.10 | length 1685.6
  Top Layer w10: I2C2.1 613.84,2153.9 1333.9,2153.9 1432.32,2252.32 U1.10
  other v1: 190,1740.51
PF1: I2C2.2 U1.11 | length 1697.8
  Top Layer w10: I2C2.2 220,1690 645,2115 1365,2115 1482.64,2232.64 U1.11
  other v1: 190,1690
PF9: IO1.4 U1.21 | length 2020.3
  Top Layer w10: U1.21 1730,2035.79 1745,2020.79 v1(1745,1985) ; IO1.4 1900,250.06 v1(1900,390)
  Bottom Layer w10: v1(1745,1985) 1695,1935 1695,595 v1(1900,390)
  other v1: 1855,190
RESET: C14.2 H1.1 R24.1 RESET.1 U1.25 | length 3920.7
  Top Layer w10: RESET.1 1247.6,562.4 C14.2 1570.63,555 1588.11,572.48 v1(1588.11,720) ; v1(1588.5,1935) 1610.55,1957.05 U1.25 2252.05,1957.05 v1(2280,1985) ; v1(2280,2885) 2455,3060 H1.1
  Bottom Layer w10: v1(1588.11,720) 1588.5,720.39 v1(1588.5,1935) ; v1(2280,1985) v1(2280,2885)
SWCLK: H1.6 U1.109 | length 815.6
  Top Layer w10: U1.109 2432.99,2567.22 2610,2744.22 2610,3180 H1.6
SWDIO: H1.2 U1.105 | length 1027
  Top Layer w10: U1.105 2589.13,2370.43 v1(2628.5,2409.8)
  Bottom Layer w10: H1.2 2505,3175 2505,3110 2628.5,2986.5 v1(2628.5,2409.8)
VCC: BEEP.1 C2.1 C5.1 C20.1 C21.1 C22.1 C23.1 C24.1 C25.1 C26.1 C27.1 C28.1 C29.1 C30.1 C31.1 C32.1 C51.1 H1.8 LED.1 R22.2 R24.2 R28.2 U1.6 U1.17 U1.30 U1.39 U1.52 U1.62 U1.72 U1.84 U1.95 U1.108 U1.121 U1.131 U1.144 U2.4 UT1.4 UT2.4 UT3.4 UT4.4 | length 4400.5
  Top Layer w10: LED.1 969.1,1290.9 v1(970,1290) ; C2.1 C2.1@1528.5,2980.75 ; C31.1@1534.37,1855 1537.99,1858.62 U1.30 ; v4(1537.87,2430) 1537.87,2406.38 1613.19,2331.06 U1.6 1714.57,2331.06 ; v4(1538.5,2114.53) U1.17 ; U1.144@1743.5,2501.06 1743.9,2501.45 U1.144 1744.02,2650.75 v4(1743.5,2651.26) ; v4(1780,1514.96) 1783.39,1518.35 U1.39 ; v4(1993.5,2651.26) 1999.92,2644.84 U1.131 ; v4(2033.5,1508.98) 2039.29,1514.77 U1.52 ; U1.121 2196.77,2649.53 C28.1 ; v4(2228.5,1508.98) 2236.14,1516.62 U1.62 ; v4(2478.5,1510) 2478.5,1520 2432.99,1565.51 U1.72 2432.99,1929.14 2460.9,1957.05 U1.84 2696.18,1957.05 v4(2699.13,1960) ; U1.95 2697.72,2173.58 v4(2699.13,2175) ; U1.108 2554.49,2429.49 2630,2505 v4(2698.5,2505)
  Top Layer w18: UT4.4 UT4.4@225.92,655.92 ; UT2.4 UT2.4@879.08,230.37 ; R28.2 1601.61,2651.26 v4(1743.5,2651.26) ; C31.1@1534.37,1855 C31.1@1538.5,1850.87 ; R22.2 1657.87,563.5 v4(1654.37,560) R24.2 ; v4(2698.5,2505) C51.1@2698.5,2795
  Top Layer w30: U2.4 1085,2771.26 C5.1 ; C5.1@1292.72,2976.26 1512.99,2976.26 C2.1 ; R28.2 C2.1@1528.5,2980.75
  Bottom Layer w18: v4(1537.87,2430) v4@1538.5,2429.37 ; v4(1780,1514.96) 1794.96,1500 ; 2024.52,1500 v4(2033.5,1508.98) ; v4(2228.5,1508.98) 2229.13,1508.35 v4@2230.78,1510 ; v4@2698.5,2175.63 v4(2699.13,2175)
  other v1: 2345,190 880,200 195,655.13 195,1140.13
  other v4: 1540,1860 2198.5,2649.53
VDDA: C15.2 C16.2 R21.2 R22.1 U1.33 | length 1518.8
  Top Layer w10: 1609.82,1760 1609.82,1782.22 1627.17,1799.57 U1.33
  Top Layer w15: R21.2 1423.5,955.63 R22.1@1577.87,801.26 ; R22.1 R22.1@1577.87,801.26 ; 1609.82,1760 1609.82,1281.94 1582.87,1255 1582.87,1055 C16.2 R22.1@1577.87,801.26
VREF+: C33.1 R21.1 U1.32 | length 1024.1
  Top Layer w10: 1582.87,1705 1582.87,1796.26 1605.87,1819.25 U1.32
  Top Layer w15: R21.1 1191.61,1037.48 C33.1 1582.87,1686.26 1582.87,1705
pads on no net: H1.3 H1.5 H1.7 H1.9 H1.10 I2C2.3 I2C2.5 I2C2.6 I2C3.3 I2C3.5 I2C3.6 IO1.5 IO1.6 RESET.3 RESET.4 SPI1.5 SPI1.6 SPI2.5 SPI2.6 U1.1 U1.2 U1.4 U1.5 U1.7 U1.12 U1.13 U1.14 U1.15 U1.18 U1.19 U1.20 U1.22 U1.26 U1.27 U1.28 U1.29 U1.34 U1.35 U1.40 U1.49 U1.50 U1.53 U1.54 U1.55 U1.56 U1.57 U1.58 U1.60 U1.63 U1.64 U1.65 U1.66 U1.67 U1.68 U1.73 U1.77 U1.78 U1.79 U1.80 U1.81 U1.82 U1.85 U1.86 U1.87 U1.88 U1.89 U1.90 U1.91 U1.92 U1.93 U1.103 U1.104 U1.110 U1.113 U1.114 U1.115 U1.116 U1.117 U1.118 U1.119 U1.122 U1.123 U1.124 U1.125 U1.126 U1.127 U1.128 U1.129 U1.132 U1.133 U1.134 U1.135 U1.141 U1.142 U2.2 UT1.5 UT1.6 UT2.5 UT2.6 UT3.5 UT3.6 UT4.5 UT4.6
copper on no net:
  other v1: 3255,185 187.48,1640.79
  other v2: 3909.47,660 3909.47,885 2845,1000 3909.47,1405 3909.47,1625 3909.47,2134.21 3909.47,2340 955,2620 952.99,2805 3909.47,2850 3909.47,3075 2810,3795 3030,3795 845,3800 1060,3800 1510,3800 1715,3800 2150,3800 2363.5,3800
  other v3: 3080,70 3385,70 1445,75 1633.5,75 1930,75 2120,75 2420,75 2600,75 2900,75 1145,80 955.85,83.15 80,580 80,880 75,1060 80,1360 80,1510 75,1810
  other v5: 654.68,83.15

## Polygon pours and split planes (outlines as drawn)
GND on Bottom Layer "GND" (solid, pour order 48): 0,3940 5,3935 3935,3935 3935,0 0,0
GND on Top Layer "GND" (solid, pour order 52): 0,3935 3935,3935 3935,0 0,0
KEY on 5V "GND" (solid, pour order 54): 0,3935 3935,3935 3935,0 0,0
VCC on VCC "VCC" (solid, pour order 58): 0,3935 3935,3935 3935,0 0,0

## Silkscreen, mask and mechanical layers (free items; w line width, h text height)
Top Overlay:
  text "PWM" at 672.99,3440.02 h60
  text "5V" at 917.99,3440.02 h60
  text "GND" at 1092.99,3440.02 h60
  text "PWM" at 1342.99,3440.02 h60
  text "5V" at 1597.99,3440.02 h60
  text "GND" at 1752.99,3440.02 h60
  text "PWM" at 1993.5,3440.02 h60
  text "5V" at 2222.99,3440.02 h60
  text "GND" at 2402.99,3440.02 h60
  text "PWM" at 2647.99,3440.02 h60
  text "5V" at 2897.99,3440.02 h60
  text "GND" at 3087.99,3440.02 h60
  text "KEY" at 362.99,3380 h60
  text "SWCLK" at 2580,3370 h40
  text "VCC" at 2800,3370 h40
  text "GND" at 2435,3365 h40
  text "SWDIO" at 2062.6,3215 h40
  text "PWM" at 3392.99,3135 h60
  text "RST" at 2105,3100 h40
  text "5V" at 3392.99,2925 h60
  text "5V" at 372.99,2765 h60
  text "GND" at 3392.99,2695 h60
  text "GND" at 362.99,2550 h60
  text "PWM" at 3392.99,2415 h60
  text "GND" at 390,2255 h60
  text "5V" at 3392.99,2215.8 h60
  text "KEY1" at 385,2015 h60
  text "GND" at 3392.99,2010 h60
  text "SDA" at 245,1745 h40
  text "PWM" at 3392.99,1720 h60
  text "SCL" at 250,1680 h40
  text "GND" at 251.57,1555 h40
  text "5V" at 3392.99,1508.98 h60
  text "GND" at 3392.99,1300 h60
  text "GND" at 300,1290.9 h40
  text "RX" at 305,1225 h40
  text "TX" at 300,1160 h40
  text "VCC" at 310,1105 h40
  text "PWM" at 3392.99,985 h60
  text "GND" at 280,800 h40
  text "5V" at 3407.99,745 h60
  text "TX" at 285,739.57 h40
  text "RX" at 295,675 h40
  text "VCC" at 295,615 h40
  text "GND" at 3392.99,540 h60
  text "TX" at 805,295 h40 r90
  text "RX" at 865,295 h40 r90
  text "GND" at 745,290 h40 r90
  text "PF9" at 1900,290 h40 r90
  text "RX" at 2325,290 h40 r90
  text "VCC" at 2380,290 h40 r90
  text "VCC" at 925,285 h40 r90
  text "PC4" at 1710,285 h40 r90
  text "PC5" at 1775,285 h40 r90
  text "PB0" at 1840,285 h40 r90
  text "TX" at 2265,285 h40 r90
  text "GND" at 2205,280 h40 r90
  text "MISO" at 2745,280 h40 r90
  text "MOSI" at 2805,280 h40 r90
  text "GND" at 2870,280 h40 r90
  text "SCK" at 1230,275 h40 r90
  text "MISO" at 1290,275 h40 r90
  text "MOSI" at 1350,275 h40 r90
  text "GND" at 1412.6,275 h40 r90
  text "SCK" at 2685,275 h40 r90
  text "SDA" at 3160,270 h40 r90
  text "SCL" at 3220,270 h40 r90
  text "GND" at 3340,270 h40 r90
Top Solder:
  lines w300: 180,2845 180,3130
Mechanical 1:
  the board outline again, w10

## Text inside footprints (layer, text, board x,y; h text height)
BEEP: Top Overlay "+" at 2949.75,1565.44 h50 r315